# Altium PCB Імпульсний ліхтарик.PcbDoc
Units mil, origin at the board's own origin, x right, y up, seen from the top; angles counter-clockwise.
Board outline 7966.73 x 4748.38 mil, 2 copper layers (Top Layer, Top, Bottom Layer, Bottom); 13 components, 9 nets, 29 pads, 0 vias.
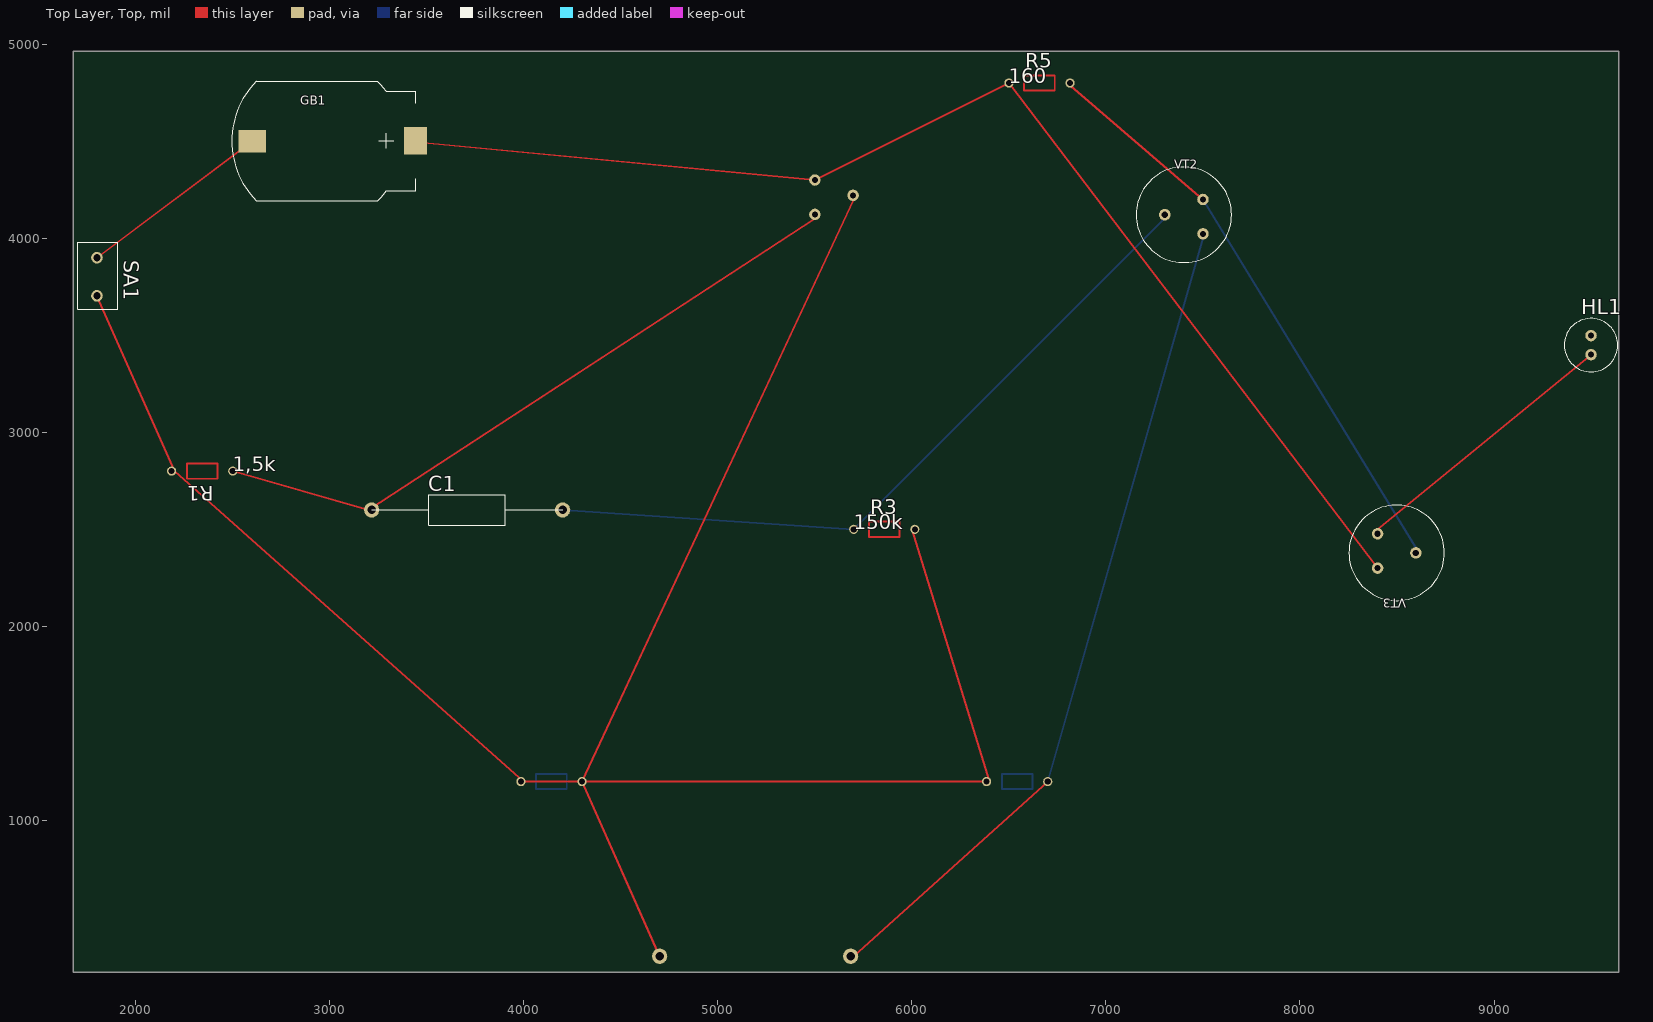
[diagram p0: Top Layer, Top view]
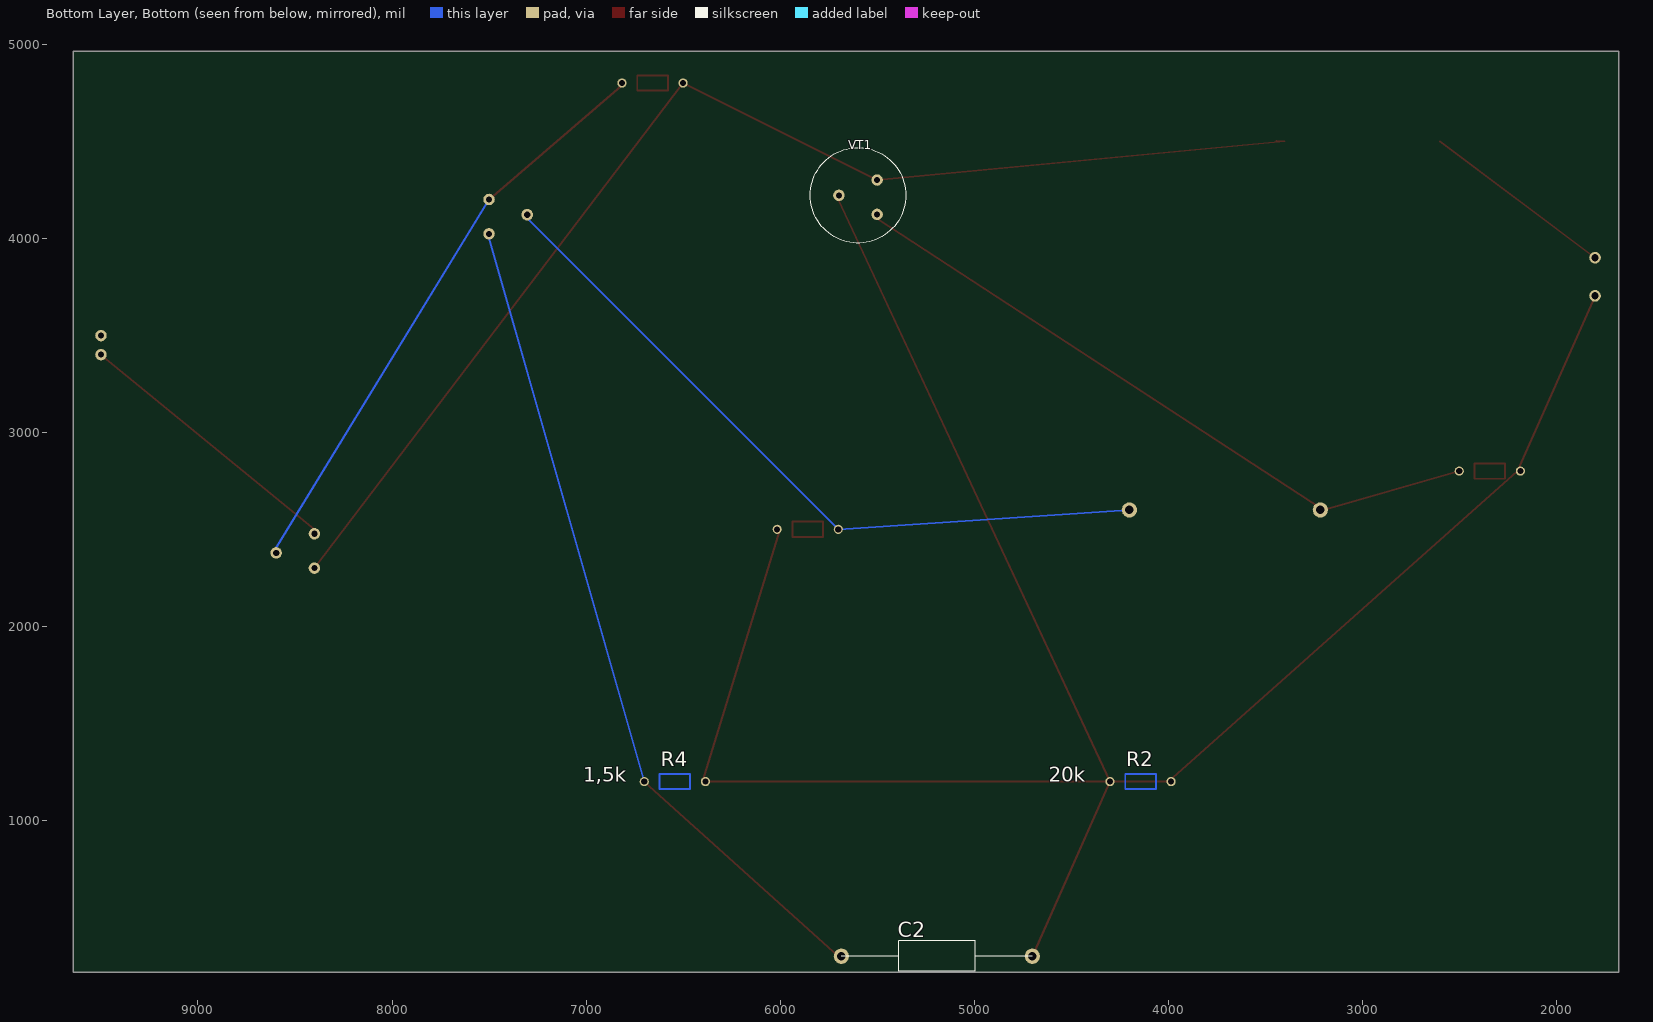
[diagram p1: Bottom Layer, Bottom view, seen from below]

## Layer stack, top to bottom
Top Solder, Top Mask: solder mask 0.4, Solder Resist, Dk 3.5
Top Layer, Top: signal copper 1.4
Dielectric 1: dielectric 12.6, FR-4, Dk 4.8
Bottom Layer, Bottom: signal copper 1.4
Bottom Solder, Bot Mask: solder mask 0.4, Solder Resist, Dk 3.5

## Board outline
1676.97,216.34 9643.7,216.34 9643.7,4964.72 1676.97,4964.72

## Design rules (kind name [scope] priority, off if disabled: settings)
Clearance [All] p1: gap=10 ignorepadtopadclearanceinfootprint=FALSE except(0: Arc-Hole Track-Hole SMDPad-Hole THPad-Hole Via-Hole Fill-Hole Poly-Hole Region-Hole Text-Hole; 12: Arc-Arc Arc-Track Arc-THPad Arc-Via Track-Track Track-THPad Track-Via THPad-THPad THPad-Via Via-Via)
PlaneClearance [All] p1: clearance=10
PolygonConnect [All] p1: connectstyle=Relief reliefconductorwidth=10 reliefentries=4 polygonreliefangle="90 Angle" airgapwidth=10
RoutingVias [All] p1: holewidth=28 width=50 viastyle="Through Hole" minholewidth=28 minwidth=50 maxholewidth=28 maxwidth=50
SolderMaskExpansion [All] p1: expansion=4 istentingtop=FALSE
Width [All] p1: maxlimit=10 minlimit=10 preferedwidth=10
29 further rules are at their usual default settings.

## Components (designator, comment, footprint, x,y, rotation, side; value= is the part's Value field where it differs from the comment)
C1 "50mk x 6B" 4,0X10,0X1,0 4200,2600 r0 top
C2 "10mk x 6B" 4,0X10,0X1,0 4700,300 r180 bottom
GB1 "4,5" BH023(CR2032)_SMD 2600,4500 r0 top
HL1 "2,5B" HL_MINI 9500,3400 r0 top
R1 "1,5k" R100 2500,2800 r180 top
R2 "20k" R100 4300,1200 r180 bottom
R3 "150k" R100 5700,2500 r0 top
R4 "1,5k" R100 6700,1200 r180 bottom
R5 "160" R100 6500,4800 r0 top
SA1 "" 8AS9M2RE 1800,3900 r270 top
VT1 "" П27_МП41А(Primary) 5500,4300 r180 bottom
VT2 "" П27_МП41А(Primary) 7500,4200 r0 top
VT3 "" П27_МП41А(Primary) 8400,2300 r180 top

## Footprints (in the part's own frame and the unit in brackets; to place one, negate y for a bottom-side part, rotate by r counter-clockwise, add the part's x,y. Pads: shape width x height; smd on the part's side, far side on the other; paste and mask are expansions set on the pad)
4,0X10,0X1,0 [mm]
  round 2 hole 1.1: 1(0,0) 2(-25,0)
  silkscreen extent -25,-2 0,2
8AS9M2RE [mil]
  round 60 hole 38: 1(0,0) 2(196.85,0)
  silkscreen extent -79,-98 266,108
BH023(CR2032)_SMD [mm]
  rect 3.6x3 smd: 1(0,0)
  rect 3x3.6 smd: 2(21.4,0.05)
  silkscreen extent -2.67,-7.78 21.38,7.82
HL_MINI [mm]
  round 1.5 hole 0.8: 1(0,0) 2(0,2.5)
  silkscreen extent -3.5,-2.25 3.5,4.75
R100 [mm]
  round 1.2 hole 0.8: 1(0,0) 2(8,0)
  Top Layer, Top lines w0.254: 6,1 2,1 2,-1 6,-1 6,1
П27_МП41А(Primary) [mm]
  round 1.5 hole 0.8: B(-5,-2) E(0,0) K(0,-4.5)
  silkscreen extent -8.75,-8.25 3.75,4.25

## Nets (pads, with @x,y where several pads share a name; then routed paths per layer and width w, separated by ;. In a path a pad name is that pad's centre, name@x,y a point inside that pad or via, vN(x,y) a via of type N, cw(c..) or ccw(c..) an arc to the next point about the centre after c; other vN are vias at no path point)
+5B: R1.2 R2.2 R3.2 R4.2 SA1.2 | length 7201.4
  Top Layer, Top w10: SA1.2 1800,3700 R1.2@2200,2800 ; R1.2 R1.2@2200,2800 ; R2.2 R2.2@4000,1200 ; R3.2 6000,2500 6400,1200 R4.2 R2.2@4000,1200 ; R1.2@2200,2800 R2.2@4000,1200
NET00000: GB1.2 R5.1 VT1.E VT3.E | length 6410.2
  Top Layer, Top w10: GB1.2 3400,4500 VT1.E R5.1 VT3.E
NET00001: GB1.1 SA1.1 | length 1000
  Top Layer, Top w10: SA1.1 GB1.1
NET00004: C1.2 R1.1 VT1.K | length 3512.5
  Top Layer, Top w10: R1.1 C1.2@3200,2600 ; C1.2 C1.2@3200,2600 ; VT1.K 5500,4100 C1.2@3200,2600
NET00005: C2.1 R2.1 VT1.B | length 4317
  Top Layer, Top w10: C2.1 R2.1 5700,4200 VT1.B
NET00006: R5.2 VT2.E VT3.B | length 3067.9
  Top Layer, Top w10: R5.2 6800,4800 VT2.E
  Bottom Layer, Bottom w10: VT2.E 8600,2400 VT3.B
NET00007: C1.1 R3.1 VT2.B | length 3787.6
  Bottom Layer, Bottom w10: C1.1 R3.1 7300,4100 VT2.B
NET00009: C2.2 R4.1 VT2.K | length 4296
  Top Layer, Top w10: C2.2 5700,300 R4.1
  Bottom Layer, Bottom w10: R4.1 7500,4000 VT2.K
NET00010: HL1.1 VT3.K | length 1444.1
  Top Layer, Top w10: VT3.K 8400,2500 HL1.1
pads on no net: HL1.2

## Text inside footprints (layer, text, board x,y; h text height)
VT1: Mechanical 2, Bot Assy "Э" at 5588.58,4270.47 h59.06; Mechanical 2, Bot Assy "K" at 5578.74,4093.31 h59.06; Mechanical 2, Bot Assy "Б" at 5657.48,4191.73 h59.06
VT2: Mechanical 1, Top Assy "Э" at 7411.42,4170.47 h59.06; Mechanical 1, Top Assy "K" at 7421.26,3993.31 h59.06; Mechanical 1, Top Assy "Б" at 7342.52,4091.73 h59.06
VT3: Mechanical 1, Top Assy "Э" at 8488.58,2329.53 h59.06 r180; Mechanical 1, Top Assy "K" at 8478.74,2506.69 h59.06 r180; Mechanical 1, Top Assy "Б" at 8557.48,2408.27 h59.06 r180